# Altium PCB MCX-A153__Shield_Template.PcbDoc
Units mil, origin at the board's own origin, x right, y up, seen from the top; angles counter-clockwise.
Board outline 3600 x 2150 mil, 2 copper layers (Top Layer, Bottom Layer), stack 61.7 mil thick; 13 components, 45 nets, 68 pads, 0 vias.
Unrouted connection lines stored in the file: 2.
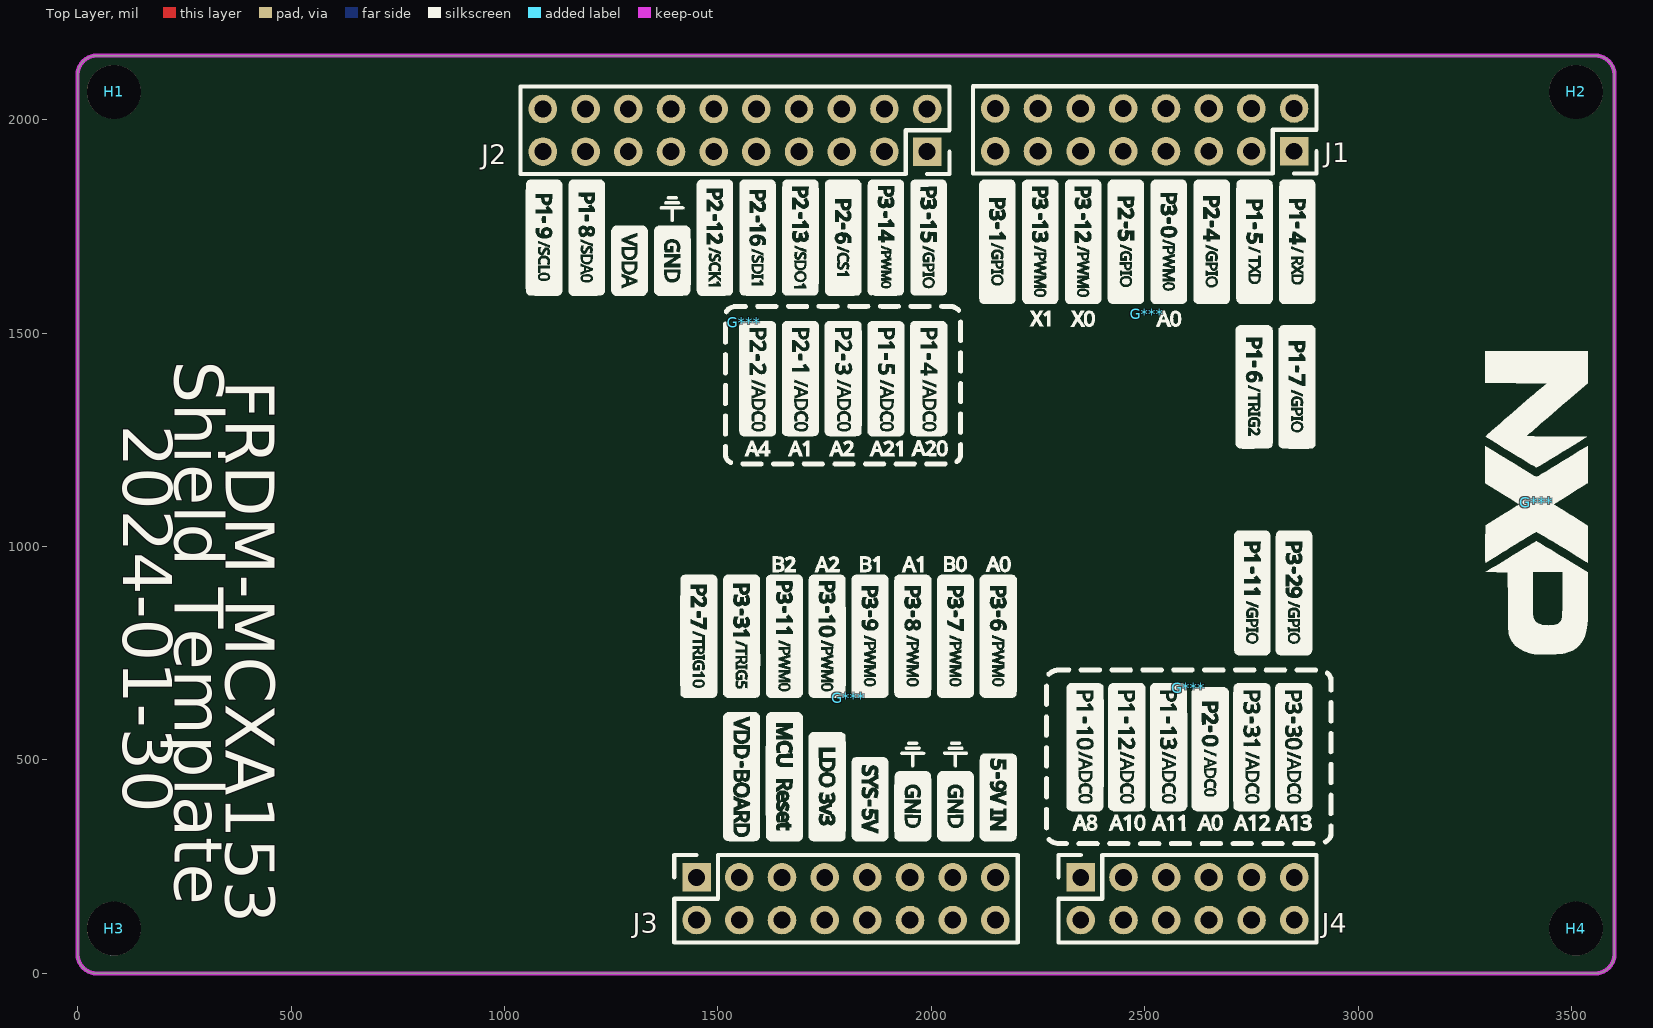
[diagram p0: Top Layer view]
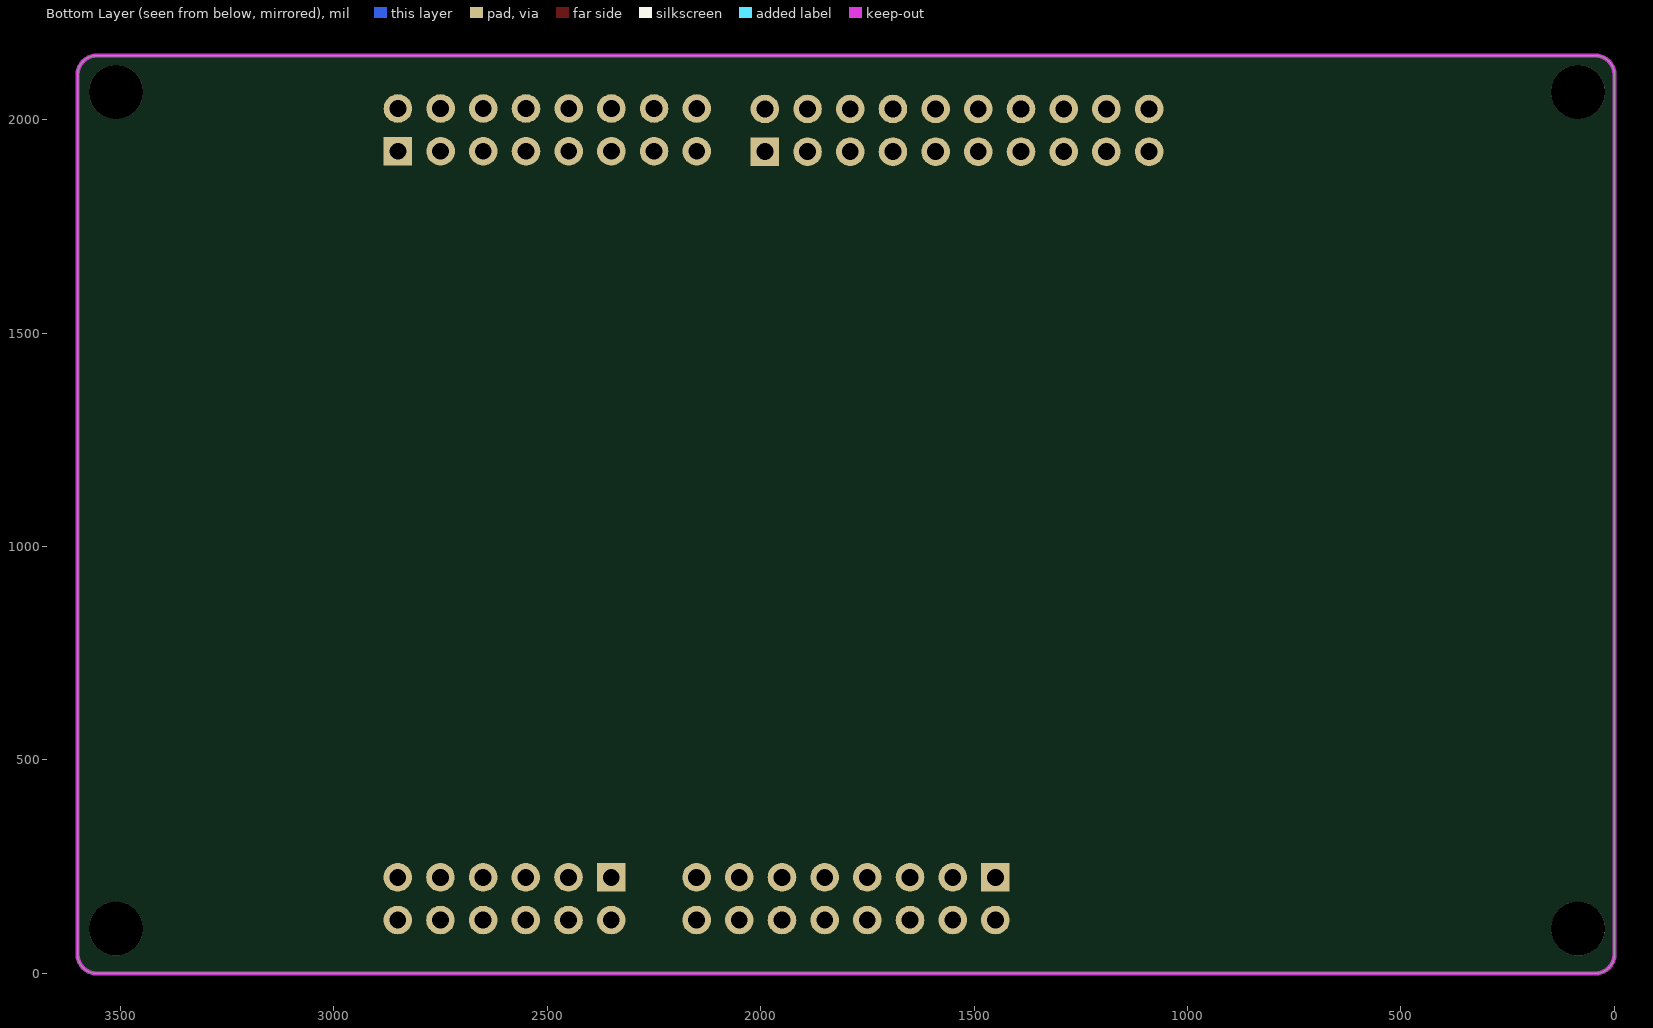
[diagram p1: Bottom Layer view, seen from below]

## Layer stack, top to bottom
Top Solder: solder mask 0.4, Solder Resist, Dk 3.5
Top Layer: signal copper 1.4
Dielectric 1: dielectric 58.9, FR-4, Dk 4.8
Bottom Layer: signal copper 1.4
Bottom Solder: solder mask 0.4, Solder Resist, Dk 3.5

## Board outline
0,45 0,2105 cw(c45,2105) 45,2150 3555,2150 cw(c3555,2105) 3600,2105 3600,45 cw(c3555,45) 3555,0 45,0 cw(c45,45)

## Design rules (kind name [scope] priority, off if disabled: settings)
Clearance [All] p1: gap=10 ignorepadtopadclearanceinfootprint=FALSE except(0: Arc-Hole Track-Hole SMDPad-Hole THPad-Hole Via-Hole Fill-Hole Poly-Hole Region-Hole Text-Hole)
HoleSize [All] p1: absolutevalues=TRUE maxlimit=150 minlimit=1 maxpercent=80.000 minpercent=20.000
PolygonConnect [All] p1: connectstyle=Relief reliefconductorwidth=10 reliefentries=4 polygonreliefangle="90 Angle" airgapwidth=10
RoutingVias [All] p1: holewidth=28 width=50 viastyle="Through Hole" minholewidth=28 minwidth=50 maxholewidth=28 maxwidth=50
SolderMaskExpansion [All] p1: expansion=4 istentingtop=FALSE
Width [All] p1: maxlimit=10 minlimit=10 preferedwidth=10
29 further rules are at their usual default settings.

## Classes and differential pairs
component class MCX-A153__Shield_Template: H1 H2 H3 H4 J1 J2 J3 J4

## Components (designator, comment, footprint, x,y, rotation, side; value= is the part's Value field where it differs from the comment)
G*** "LOGO" J3 1806,644 r0 top
G*** "LOGO" J2 2506,1544.59 r0 top
G*** "LOGO" nxp_logo 3418.5,1102.36 r270 top
G*** "LOGO" J4 2603,668 r0 top
G*** "LOGO" J2 1562,1524 r0 top
H1 "Mechanical_MountingHole" MountingHole_3.2mm_M3 85,2065 r0 top value=MountingHole
H2 "Mechanical_MountingHole" MountingHole_3.2mm_M3 3510,2065 r0 top value=MountingHole
H3 "Mechanical_MountingHole" MountingHole_3.2mm_M3 85,105 r0 top value=MountingHole
H4 "Mechanical_MountingHole" MountingHole_3.2mm_M3 3510,105 r0 top value=MountingHole
J1 "SSQ-108-03-T-D" SSQ-108-03-T-D 2499.61,1975.98 r270 top
J2 "SSQ-110-23-G-D" SSQ-110-23-G-D 1540,1975 r270 top
J3 "SSQ-108-03-T-D" SSQ-108-03-T-D 1800,175 r90 top
J4 "SSQ-106-03-T-D" SSQ-106-03-T-D 2600.04,175 r90 top

## Footprints (in the part's own frame and the unit in brackets; to place one, negate y for a bottom-side part, rotate by r counter-clockwise, add the part's x,y. Pads: shape width x height; smd on the part's side, far side on the other; paste and mask are expansions set on the pad)
J2 [mil]
  silkscreen extent -394,-315 394,315
J3 [mil]
  silkscreen extent -394,-334 394,334
J4 [mil]
  silkscreen extent -339,-370 339,369
MountingHole_3.2mm_M3 [mm]
  round 3.2 hole 3.2 paste-2539.97 mask+0: Un1(0,0)
nxp_logo [mil]
  silkscreen extent -355,-121 355,119
SSQ-106-03-T-D [mm]
  rect 1.7x1.7 hole 1 paste-2539.97 mask+0: 1(1.27,6.35)
  rrect100% 1.7x1.7 hole 1 paste-2539.97 mask+0: 2(-1.27,6.35) 3(1.27,3.81) 4(-1.27,3.81) 5(1.27,1.27) 6(-1.27,1.27) 7(1.27,-1.27) 8(-1.27,-1.27) 9(1.27,-3.81) 10(-1.27,-3.81) 11(1.27,-6.35) 12(-1.27,-6.35)
  silkscreen extent -2.6,-7.68 2.6,7.68
SSQ-108-03-T-D [mm]
  rect 1.7x1.7 hole 1 paste-2539.97 mask+0: 1(1.27,8.89)
  rrect100% 1.7x1.7 hole 1 paste-2539.97 mask+0: 2(-1.27,8.89) 3(1.27,6.35) 4(-1.27,6.35) 5(1.27,3.81) 6(-1.27,3.81) 7(1.27,1.27) 8(-1.27,1.27) 9(1.27,-1.27) 10(-1.27,-1.27) 11(1.27,-3.81) 12(-1.27,-3.81) 13(1.27,-6.35) 14(-1.27,-6.35) 15(1.27,-8.89) 16(-1.27,-8.89)
  silkscreen extent -2.6,-10.22 2.6,10.22
SSQ-110-23-G-D [mm]
  rect 1.7x1.7 hole 1 paste-2539.97 mask+0: 1(1.27,11.43)
  rrect100% 1.7x1.7 hole 1 paste-2539.97 mask+0: 2(-1.27,11.43) 3(1.27,8.89) 4(-1.27,8.89) 5(1.27,6.35) 6(-1.27,6.35) 7(1.27,3.81) 8(-1.27,3.81) 9(1.27,1.27) 10(-1.27,1.27) 11(1.27,-1.27) 12(-1.27,-1.27) 13(1.27,-3.81) 14(-1.27,-3.81) 15(1.27,-6.35) 16(-1.27,-6.35) 17(1.27,-8.89) 18(-1.27,-8.89) 19(1.27,-11.43) 20(-1.27,-11.43)
  silkscreen extent -2.6,-12.76 2.6,12.76

## Part data
G***: library part J3
G*** G***: library part J2
G***: library part nxp_logo
G***: library part J4
J1 J3: library part Connector_Generic_Conn_02x08_Odd_Even, Manufacturer="Samtec Inc.", Manufacturer Part Number=SSQ-110-23-G-D, Add into BOM=yes, Convert to PCB=yes, Device=Connector_Generic_Conn_02x08_Odd_Even, Name=Connector_Generic_Conn_02x08_Odd_Even, Origin Footprint=SSQ-108-03-T-D, Supplier=Digikey, Supplier P/N=SAM10741-ND, Symbol=Connector_Generic_Conn_02x08_Odd_Even, User doc link=~
J2: library part Connector_Generic_Conn_02x10_Odd_Even, Manufacturer="Samtec Inc.", Add into BOM=yes, Convert to PCB=yes, Device=Connector_Generic_Conn_02x10_Odd_Even, Manufacturer Part Number=SSQ-110-23-G-D, Name=Connector_Generic_Conn_02x10_Odd_Even, Origin Footprint=SSQ-110-23-G-D, Supplier=Digikey, Supplier P/N=SAM10741-ND, Symbol=Connector_Generic_Conn_02x10_Odd_Even, User doc link=~
J4: library part Connector_Generic_Conn_02x06_Odd_Even, Manufacturer="Samtec Inc.", Add into BOM=yes, Convert to PCB=yes, Device=Connector_Generic_Conn_02x06_Odd_Even, Manufacturer Part Number=SSQ-106-03-T-D, Name=Connector_Generic_Conn_02x06_Odd_Even, Origin Footprint=SSQ-106-03-T-D, Supplier=Digikey, Supplier P/N=SAM1204-06-ND, Symbol=Connector_Generic_Conn_02x06_Odd_Even, User doc link=~
H1 H2 H3 H4: Add into BOM=yes, Convert to PCB=yes, Device=Mechanical_MountingHole, Name=Mechanical_MountingHole, Origin Footprint=MountingHole_3.2mm_M3, Symbol=Mechanical_MountingHole, User doc link=~

## Nets (pads, with @x,y where several pads share a name; then routed paths per layer and width w, separated by ;. In a path a pad name is that pad's centre, name@x,y a point inside that pad or via, vN(x,y) a via of type N, cw(c..) or ccw(c..) an arc to the next point about the centre after c; other vN are vias at no path point)
5v-9v: J3.16
GND: J2.14 J3.12 J3.14
LDO-3V3: J3.8
MCU-RESETn: J3.6
P1-4/ADC0-A20: J2.1
P1-4/UART2-RXD: J1.2
P1-5/ADC0-A21: J2.3
P1-5/UART2-TXD: J1.4
P1-6/TRIG2: J1.3
P1-7/GPIO: J1.1
P1-8/SDA0: J2.18
P1-9/SCL0: J2.20
P1-10/ADC0-A8: J4.2
P1-11/GPIO: J4.9
P1-12/ADC0-A10: J4.4
P1-13/ADC0-A11: J4.6
P2-0/ADC0-A0: J4.8
P2-1/ADC0-A1: J2.7
P2-2/ADC0-A4: J2.9
P2-3/ADC0-A2: J2.5
P2-4/GPIO: J1.6
P2-5/GPIO: J1.10
P2-6/CSI1: J2.6
P2-12/SCK1: J2.12
P2-13/SDO1: J2.8
P2-16/SDI1: J2.10
P3-0/PWM0-A0: J1.8
P3-1/GPIO: J1.16
P3-6/PWM0-A0: J3.15
P3-7/PWM0-B0: J3.13
P3-8/PWM0-A1: J3.11
P3-9/PWM0-B1: J3.9
P3-10/PWM0-A2: J3.7
P3-11/PWM0-B2: J3.5
P3-12/PWM0-X2: J1.12
P3-13/PWM0-X1: J1.14
P3-14/PWM0-X2: J2.4
P3-15/GPIO: J2.2
P3-29/GPIO: J4.11
P3-30/ADC0-A13: J4.12
P3-31/ADC0-A12: J4.10
P3-31/TRIG5: J3.3
SYS-5V: J3.10
VDD-BOARD: J3.4
VDDA_MCU: J2.16
pads on no net: H1.Un1 H2.Un1 H3.Un1 H4.Un1 J1.5 J1.7 J1.9 J1.11 J1.13 J1.15 J2.11 J2.13 J2.15 J2.17 J2.19 J3.1 J3.2 J4.1 J4.3 J4.5 J4.7

## Keep-outs
Keep-Out Layer:
  lines w0: 0,45 ccw(c45,45) 45,0 3555,0 ccw(c3555,45) 3600,45 3600,2105 ccw(c3555,2105) 3555,2150 45,2150 ccw(c45,2105) 0,2105 0,45
  lines w10: 0,45 ccw(c45,45) 45,0 3555,0 ccw(c3555,45) 3600,45 3600,2105 ccw(c3555,2105) 3555,2150 45,2150 ccw(c45,2105) 0,2105 0,45

## Silkscreen, mask and mechanical layers (free items; w line width, h text height)
Top Overlay:
  text "Shield Template" at 190,1435 h196.85 r270
  text "FRDM-MCXA153" at 310,1390 h196.85 r270
  text "2024-01-30" at 70,1285 h196.85 r270
Mechanical 17:
  text "Note:   Always double check pin header IO assignments and mechanicals.  This template was created using the latest available documentation for the FRDM MCX-A153. Efforts were made to ensure mechanical/electrical accuracy.   /  / This template is distributed in the hope that it will be useful, but WITHOUT ANY WARRANTY; without even the implied warranty of MERCHANTABILITY or FITNESS FOR A PARTICULAR PURPOSEText" at 505,-1232.03 h75